# EAGLE board Lora_LR1262_Node_ Board_V1.0 (EAGLE 9.5.1)
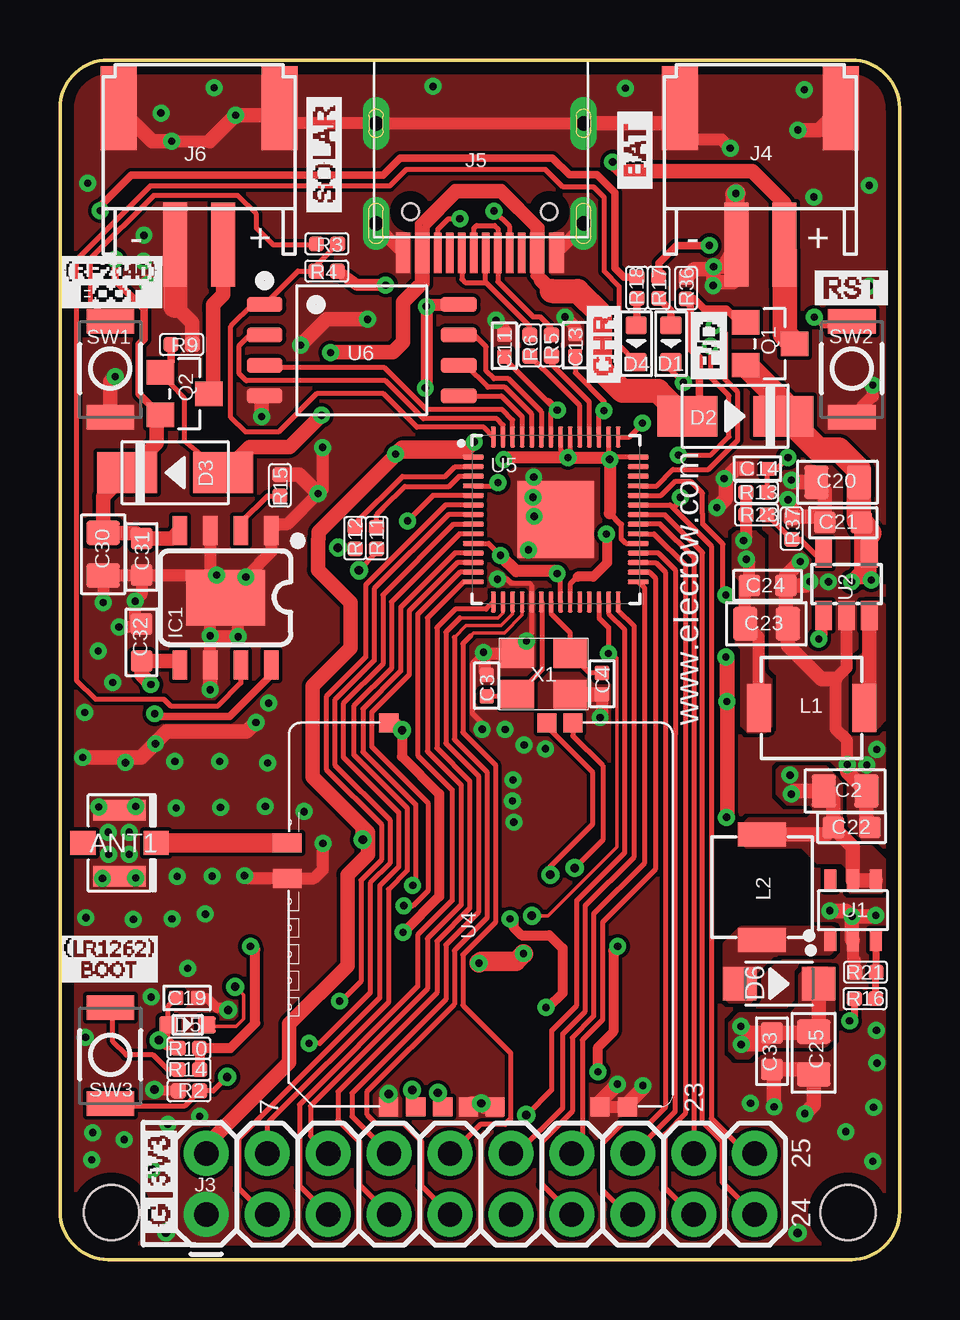
[diagram p0: board, top side]
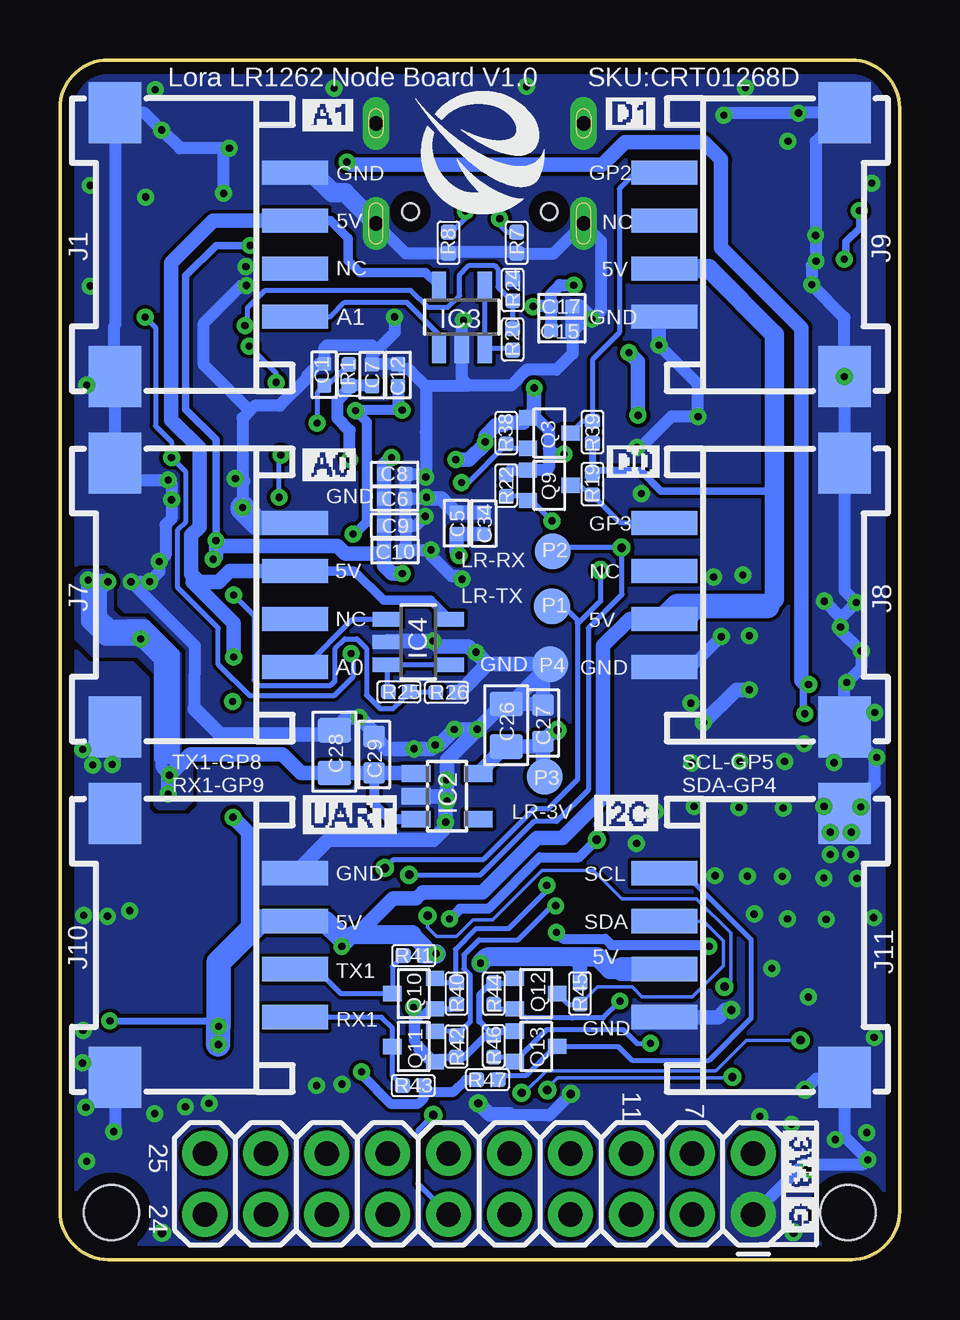
[diagram p1: board, bottom side, seen from below]

Size 35 x 50 mm. Coordinates in mm from the lower left corner, seen from the top.
Outline: 0,2 0,48 arc-90 2,50 33,50 arc-90 35,48 35,2 arc-90 33,0 2,0 arc-90 0,2
Copper layers (1*16): Top 0.035mm / dielectric 1.5mm / Bottom 0.035mm
Design rules "default *": minimum track width 6mil, minimum drill 0.3mm, track to track 6mil, track to pad 6mil, pad to pad 6mil, via to via 6mil, smd to smd 6mil, copper to edge 20mil, drill to drill 6mil, minimum pad ring 10mil, minimum via ring 8mil, stop-mask expansion 4mil, vias tented up to drill 100mil, thermal gap 10mil
Holes 2.3 mm at 2.15,1.95 32.85,1.95
tRestrict: 15 lines

## Footprints (pad centres in the part's own frame; a part is rotated, then mirrored left to right if it is on the bottom)
SPARKFUN2_U.FL = smd 2.2 x 0.85: P$1 0,1.375; P$2 0,-1.375 | smd 1.05 x 1: P$3 1.525,0; P$4 -1.525,0
0402 = smd 0.6 x 0.6: 1 -0.45,0; 2 0.45,0
C0805 = smd 1.016 x 1.397: 1 -0.889,0; 2 0.889,0
C0603 = smd 0.889 x 0.889: 1 -0.762,0; 2 0.762,0
LED0603 = smd 0.762 x 0.889: + -0.762,0; - 0.762,0
SMA = smd 2.5 x 1.7: 1 2,0; 2 -2,0
D_SOD523 = smd 0.762 x 0.7: + -0.8,0; - 0.8,0
D_SOD123FL = smd 1.397 x 1.397: + -1.651,0; - 1.651,0
SOP8-PAD = smd 0.6 x 1.2: 1 -1.905,-2.8; 2 -0.635,-2.8; 3 0.635,-2.8; 4 1.905,-2.8; 5 1.905,2.8; 6 0.635,2.8; 7 -0.635,2.8; 8 -1.905,2.8 | smd 3.3 x 2.311: PAD 0,0
IC_SOT23-5 = smd 0.69 x 1.2: 1 -0.95,-1.3; 2 0,-1.3; 3 0.95,-1.3; 4 0.95,1.3; 5 -0.95,1.3
SOT23-5 = smd 0.6 x 1.2: 1 -0.95,-1.306; 2 0,-1.306; 3 0.95,-1.306; 4 0.95,1.306; 5 -0.95,1.306
CONNECTOR_4P-SMD-2.0-90D = smd 1.01 x 2.74: 1 -3,-0.1; 2 -1,-0.1; 3 1,-0.1; 4 3,-0.1 | smd 2.54 x 2.184: SS1 -5.5,7.4; SS2 5.5,7.4
2X10-DSY-P2.54 = drill 1.016 pad 1.88: 1 0,0; 2 0,2.54; 3 2.54,0; 4 2.54,2.54; 5 5.08,0; 6 5.08,2.54; 7 7.62,0; 8 7.62,2.54; 9 10.16,0; 10 10.16,2.54; 11 12.7,0; 12 12.7,2.54; 13 15.24,0; 14 15.24,2.54; 15 17.78,0; 16 17.78,2.54; 17 20.32,0; 18 20.32,2.54; 19 22.86,0; 20 22.86,2.54
PH2.0WT-2PIN = smd 1 x 3.5: P$1 -1,0; P$2 1,0 | smd 1.5 x 3.5: P$3 -3.35,-5.7; P$4 3.35,-5.7
KEVIN_3.0TYPEC-SMD = smd 0.3 x 1.7: A1 -3.35,0.5; A4 -2.55,0.5; A5 -1.25,0.5; A6 -0.25,0.5; A7 0.25,0.5; A8 1.25,0.5; A9 2.55,0.5; A12 3.35,0.5; B1 3.05,0.5; B4 2.25,0.5; B5 1.75,0.5; B6 0.75,0.5; B7 -0.75,0.5; B8 -1.75,0.5; B9 -2.25,0.5; B12 -3.05,0.5 | drill 0.6 pad 1.016 long: P$1 -4.325,-0.72; P$2 4.325,-0.72; P$3 -4.325,-4.9; P$4 4.325,-4.9 | hole 0.68: -2.89,-1.22; 2.89,-1.22
L0420 = smd 2 x 1: 1 0,2.2; 2 0,-2.2
TEST_PAD-1.5MM = smd 1.5 x 1.5: P$1 0,0
PMOS_SOT23 = smd 1.016 x 1.143: 1 -0.889,-1.016; 2 0.889,-1.016; 3 0,1.016
MOS_SOT323 = smd 0.635 x 0.762: 1 -0.635,-0.889; 2 0.635,-0.889; 3 0,0.889
R0402 = smd 0.635 x 0.635: 1 -0.445,0; 2 0.445,0
MYSMD_157SW = smd 1.016 x 1.981: 1 0,0; 2 4,0
STUDY_SOT23-6L = smd 0.5 x 0.9: 1 -0.961,-1.212; 2 -0.011,-1.212; 3 0.94,-1.212; 4 0.94,1.288; 5 -0.011,1.288; 6 -0.961,1.288
LR1262-MODULE-SMD12 = smd 0.8 x 0.8: 1 0,11.841; 2 0,10.705; 3 0,9.585; 4 0,8.508; 5 0,7.408; 9 0,3.027; 10 0,1.888; 25 16,4.158; 26 16,5.238; 32 16,11.828 | smd 0.8 x 1.2: 33 10.998,16.072; 34 9.518,16.062
RP2040_QFN-56 = smd 0.875 x 0.2: 1 -3.437,2.6; 2 -3.437,2.2; 3 -3.437,1.8; 4 -3.437,1.4; 5 -3.437,1; 6 -3.437,0.6; 7 -3.437,0.2; 8 -3.437,-0.2; 9 -3.437,-0.6; 10 -3.437,-1; 11 -3.437,-1.4; 12 -3.437,-1.8; 13 -3.437,-2.2; 14 -3.437,-2.6; 29 3.437,-2.6; 30 3.437,-2.2; 31 3.437,-1.8; 32 3.437,-1.4; 33 3.437,-1; 34 3.437,-0.6; 35 3.437,-0.2; 36 3.437,0.2; 37 3.437,0.6; 38 3.437,1; 39 3.437,1.4; 40 3.437,1.8; 41 3.437,2.2; 42 3.437,2.6 | smd 0.2 x 0.875: 15 -2.6,-3.437; 16 -2.2,-3.437; 17 -1.8,-3.437; 18 -1.4,-3.437; 19 -1,-3.437; 20 -0.6,-3.437; 21 -0.2,-3.437; 22 0.2,-3.437; 23 0.6,-3.437; 24 1,-3.437; 25 1.4,-3.437; 26 1.8,-3.437; 27 2.2,-3.437; 28 2.6,-3.437; 43 2.6,3.437; 44 2.2,3.437; 45 1.8,3.437; 46 1.4,3.437; 47 1,3.437; 48 0.6,3.437; 49 0.2,3.437; 50 -0.2,3.437; 51 -0.6,3.437; 52 -1,3.437; 53 -1.4,3.437; 54 -1.8,3.437; 55 -2.2,3.437; 56 -2.6,3.437 | smd 3.2 x 3.2: EPAD 0,0
SELF_SOIC-8-208MIL = smd 1.5 x 0.635: 1 -4.05,1.905; 2 -4.05,0.635; 3 -4.05,-0.635; 4 -4.05,-1.905; 5 4.05,-1.905; 6 4.05,-0.635; 7 4.05,0.635; 8 4.05,1.905
SMD3225 = smd 1.4 x 1.2: 1 -1.1,-0.85; 2 1.1,-0.85; 3 1.1,0.85; 4 -1.1,0.85

## Placement (x,y rotation side)
ANT1  SPARKFUN2_U.FL  [SPARKFUN2_U.FL]  2.48,17.36 0 top
C1  2.2UF  [0402]  23.98,36.88 270 bottom
C2  10UF  [C0805]  32.73,19.53 180 top
C3  15PF  [0402]  17.79,23.92 270 top
C4  15PF  [0402]  22.6,24 90 top
C5  100NF  [0402]  18.47,30.69 270 bottom
C6  100NF  [0402]  21.05,31.72 180 bottom
C7  100NF  [0402]  21.99,36.86 270 bottom
C8  100NF  [0402]  21.05,32.74 180 bottom
C9  100NF  [0402]  21.05,30.59 180 bottom
C10  2.2UF  [0402]  21.04,29.53 180 bottom
C11  2.2UF  [0402]  18.53,38.09 270 top
C12  100NF  [0402]  20.9,36.87 270 bottom
C13  100NF  [0402]  21.48,38.11 270 top
C14  100NF  [0402]  29.08,32.96 0 top
C15  100NF  [0402]  14.08,38.73 180 bottom
C17  2.2UF  [0402]  14.08,39.73 180 bottom
C19  100NF  [0402]  5.3,10.9 180 top
C20  10UF  [C0805]  32.42,32.4 0 top
C21  1UF  [C0603]  32.65,30.71 0 top
C22  1UF  [C0603]  33,18.01 180 top
C23  22UF  [C0805]  29.45,26.5 180 top
C24  1UF  [C0603]  29.5,28.1 180 top
C25  22UF  [C0805]  31.42,8.61 90 top
C26  22UF  [C0805]  16.39,22.27 270 bottom
C27  1UF  [C0603]  14.86,22.36 270 bottom
C28  10UF  [C0805]  23.56,21.17 270 bottom
C29  1UF  [C0603]  21.9,21.05 270 bottom
C30  22UF  [C0805]  1.8,29.4 90 top
C31  1UF  [C0603]  3.4,29.29 90 top
C32  100nF  [C0603]  3.4,25.72 270 top
C33  1UF  [C0603]  29.68,8.68 90 top
C34  100NF  [0402]  17.33,30.68 270 bottom
D1  BLUE  [LED0603]  25.47,38.17 270 top
D2  SS24  [SMA]  28.15,35.15 0 top
D3  SS24  [SMA]  4.8,32.8 180 top
D4  RED  [LED0603]  24.02,38.17 270 top
D5  LBAT54XV2T1G  [D_SOD523]  5.32,9.78 0 top
D6  DSK24  [D_SOD123FL]  29.98,11.5 0 top
IC1  CN3163-SOP8-PAD  [SOP8-PAD]  6.9,27.58 180 top
IC2  ME6217C33M5G-SOT23-5  [IC_SOT23-5]  18.86,19.31 270 bottom
IC3  SGM321YN5  [SOT23-5]  18.25,39.28 0 bottom
IC4  SGM321YN5  [SOT23-5]  20.06,25.74 270 bottom
J1  [CONNECTOR_4P-SMD-2.0-90D]  25.3,42.3 90 bottom
J3  [2X10-DSY-P2.54]  6.1,1.88 0 top
J4  PH2.0WT-2PIN  [PH2.0WT-2PIN]  29.2,42.3 180 top
J5  TYPEC-3.0-16P-SMD  [KEVIN_3.0TYPEC-SMD]  17.5,42.46 180 top
J6  PH2.0WT-2PIN  [PH2.0WT-2PIN]  5.8,42.3 180 top
J7  [CONNECTOR_4P-SMD-2.0-90D]  25.3,27.7 90 bottom
J8  [CONNECTOR_4P-SMD-2.0-90D]  9.7,27.7 270 bottom
J9  [CONNECTOR_4P-SMD-2.0-90D]  9.7,42.3 270 bottom
J10  [CONNECTOR_4P-SMD-2.0-90D]  25.3,13.1 90 bottom
J11  [CONNECTOR_4P-SMD-2.0-90D]  9.7,13.1 270 bottom
L1  2.2UH  [L0420]  31.33,22.99 270 top
L2  3.3UH  [L0420]  29.27,15.52 0 top
P1  TEST_PADPAD-1.5MM  [TEST_PAD-1.5MM]  14.49,27.22 0 bottom
P2  TEST_PADPAD-1.5MM  [TEST_PAD-1.5MM]  14.45,29.52 0 bottom
P3  TEST_PADPAD-1.5MM  [TEST_PAD-1.5MM]  14.8,20.13 0 bottom
P4  TEST_PADPAD-1.5MM  [TEST_PAD-1.5MM]  14.56,24.82 0 bottom
Q1  AO3401  [PMOS_SOT23]  29.6,38.17 270 top
Q2  AO3401  [PMOS_SOT23]  5.2,36.09 270 top
Q3  [MOS_SOT323]  14.6,34.45 270 bottom
Q9  [MOS_SOT323]  14.6,32.27 270 bottom
Q10  [MOS_SOT323]  20.25,11.09 90 bottom
Q11  [MOS_SOT323]  20.25,8.88 90 bottom
Q12  [MOS_SOT323]  15.15,11.09 270 bottom
Q13  [MOS_SOT323]  15.15,8.88 270 bottom
R1  10R  [R0402]  22.96,36.87 90 bottom
R2  10K  [R0402]  5.38,7.03 180 top
R3  1K  [R0402]  11.13,42.34 0 top
R4  10K  [R0402]  11.12,41.2 180 top
R5  22R  [R0402]  20.49,38.1 270 top
R6  22R  [R0402]  19.59,38.1 270 top
R7  5.1K  [R0402]  15.96,42.38 270 bottom
R8  5.1K  [R0402]  18.8,42.38 90 bottom
R9  100K  [R0402]  5.07,38.14 0 top
R10  10K  [R0402]  5.37,8.81 180 top
R11  470R  [R0402]  13.2,30.07 270 top
R12  470R  [R0402]  12.3,30.07 270 top
R13  10K  [R0402]  29.04,31.98 0 top
R14  1K  [R0402]  5.38,7.92 180 top
R15  1.2K 1%  [R0402]  9.17,32.27 270 top
R16  75K 1%  [R0402]  33.56,10.87 0 top
R17  3.3K  [R0402]  24.96,40.5 90 top
R18  5.62K  [R0402]  24.05,40.5 90 top
R19  4.7K  [R0402]  12.8,32.32 90 bottom
R20  240R 1%  [R0402]  16.13,38.35 90 bottom
R21  10K 1%  [R0402]  33.58,11.98 180 top
R22  4.7K  [R0402]  16.4,32.26 90 bottom
R23  45.3K 1%  [R0402]  29.04,31.04 180 top
R24  470R 1%  [R0402]  16.13,40.41 90 bottom
R25  240R 1%  [R0402]  20.87,23.66 0 bottom
R26  470R 1%  [R0402]  18.89,23.64 0 bottom
R36  100K  [R0402]  26.1,40.49 90 top
R37  10K 1%  [R0402]  30.5,30.47 270 top
R38  4.7K  [R0402]  16.4,34.45 90 bottom
R39  4.7K  [R0402]  12.8,34.49 270 bottom
R40  4.7K  [R0402]  18.47,11.09 270 bottom
R41  4.7K  [R0402]  20.25,12.67 0 bottom
R42  4.7K  [R0402]  18.48,8.88 270 bottom
R43  4.7K  [R0402]  20.28,7.25 0 bottom
R44  4.7K  [R0402]  16.92,11.09 90 bottom
R45  4.7K  [R0402]  13.32,11.09 90 bottom
R46  4.7K  [R0402]  16.92,8.88 90 bottom
R47  4.7K  [R0402]  17.18,7.5 180 bottom
SW1  [MYSMD_157SW]  2.1,35.1 90 top
SW2  [MYSMD_157SW]  33.01,35.1 90 top
SW3  [MYSMD_157SW]  2.1,6.5 90 top
U1  SX1308-SOT23  [STUDY_SOT23-6L]  33.07,14.52 0 top
U2  RY3420  [IC_SOT23-5]  32.79,28.15 0 top
U4  LR1262-MODULE-SMD12  [LR1262-MODULE-SMD12]  25.54,6.37 90 top
U5  RP2040_RP2040  [RP2040_QFN-56]  20.67,30.85 0 top
U6  W25Q32JV  [SELF_SOIC-8-208MIL]  12.58,37.9 0 top
U$55  [ELECROW-NEW]  20.23,43.56 0 bottom
X1  12MHZ  [SMD3225]  20.17,24.41 0 top

## Library data of the parts
ANT1 C1-C15 C17 C19-C34 D1-D6 IC1 IC2 J1 J3-J11 L1 L2 P1-P4 Q1-Q3 Q9-Q13 R1-R26 R36-R47 SW1-SW3 U2 U4 U6 X1 = Lora_RA-08H_Node_ Board
IC3 IC4 = linear
U1 = Crowtail- Air Quality Sensor  v1.0
U5 = Lora_RA-08H_Node_ Board; PROD_ID: IC-15502
U$55 = logo

## Nets
+1V1: C11.2 C12.2 C13.2 U5.23 U5.45 U5.50
+3V3: C5.2 C6.2 C7.2 C8.2 C9.2 C10.2 C15.2 C17.2 C23.2 C24.2 C34.2 J3.2 L1.2 Q3.1 Q9.1 Q10.1 Q11.1 Q12.1 Q13.1 R1.1 R4.1 R13.1 R17.2 R22.2 R23.2 R38.2 R40.2 R42.2 R44.2 R46.2 U5.1 U5.10 U5.22 U5.33 U5.42 U5.44 U5.48 U5.49 U6.8
+5V: C25.2 C33.2 D6.- IC3.5 IC4.5 J1.3 J7.3 J8.3 J9.3 J10.3 J11.3 R16.1 R19.2 R39.2 R41.2 R43.2 R45.2 R47.2
+SOLAR: J6.P$1 Q2.3
+VBAT: C32.2 IC1.5 IC1.8 J4.P$1 Q1.3
+VBUS: D2.2 D3.2 J5.A4 J5.A9 J5.B4 J5.B9 Q1.1 Q2.1 R9.1 R36.1
+VIN: C30.2 C31.2 D3.1 IC1.4 Q2.2 R18.2
+VSYS: C2.2 C20.2 C21.2 C22.2 C28.2 C29.2 D2.1 IC2.1 IC2.3 L2.1 Q1.2 U1.4 U1.5 U2.1 U2.4
A0: R25.2 R26.1 U5.38
A0_IN: IC4.1 J7.1
A0_OUT: IC4.3 IC4.4 R25.1
A1: R20.2 R24.1 U5.39
A1_IN: IC3.1 J1.1
A1_OUT: IC3.3 IC3.4 R20.1
A2: U5.40
A3: U5.41
BOOT: R3.1 SW1.2
CHRG: D4.- IC1.7
D0/TX0: R12.1 U5.2
D1/RX0: R11.1 U5.3
D2: Q3.2 R38.1 U5.4
D2_H: J9.1 Q3.3 R39.1
D3: Q9.2 R22.1 U5.5
D3_H: J8.1 Q9.3 R19.1
D4/SDA0: Q12.2 R44.1 U5.6
D4/SDA0_H: J11.2 Q12.3 R45.1
D5/SCL0: Q13.2 R46.1 U5.7
D5/SCL0_H: J11.1 Q13.3 R47.1
D6: J3.3 U5.8
D7: J3.4 U5.9
D8/TX1: Q10.2 R40.1 U5.11
D8/TX1_H: J10.2 Q10.3 R41.1
D9/RX1: Q11.2 R42.1 U5.12
D9/RX1_H: J10.1 Q11.3 R43.1
D10: J3.5 U5.13
D11: J3.6 U5.14
D12: J3.7 U5.15
D13: J3.8 U5.16
D14: J3.9 U5.17
D15: J3.10 U5.18
D16: J3.11 U5.27
D17: J3.12 U5.28
D18: J3.13 U5.29
D19: J3.14 U5.30
D20: J3.15 U5.31
D21: J3.16 U5.32
D22: J3.17 U5.34
D23: J3.18 U5.35
D24: J3.19 U5.36
D25: D1.- J3.20 U5.37
DN: J5.A7 J5.B7 R5.1
DP: J5.A6 J5.B6 R6.1
GND: ANT1.P$1 ANT1.P$2 C1.1 C2.1 C3.1 C4.1 C5.1 C6.1 C7.1 C8.1 C9.1 C10.1 C11.1 C12.1 C13.1 C14.1 C15.1 C17.1 C19.1 C20.1 C21.1 C22.1 C23.1 C24.1 C25.1 C26.1 C27.1 C28.1 C29.1 C30.1 C31.1 C32.1 C33.1 C34.1 IC1.1 IC1.3 IC1.6 IC1.PAD IC2.2 IC3.2 IC4.2 J1.4 J1.SS1 J1.SS2 J3.1 J4.P$2 J4.P$3 J4.P$4 J5.A1 J5.A12 J5.B1 J5.B12 J5.P$1 J5.P$2 J5.P$3 J5.P$4 J6.P$2 J6.P$3 J6.P$4 J7.4 J7.SS1 J7.SS2 J8.4 J8.SS1 J8.SS2 J9.4 J9.SS1 J9.SS2 J10.4 J10.SS1 J10.SS2 J11.4 J11.SS1 J11.SS2 P4.P$1 R2.2 R7.2 R8.1 R9.2 R15.1 R21.2 R24.2 R26.2 R36.2 R37.1 SW1.1 SW2.1 U1.2 U2.2 U4.1 U4.4 U4.5 U4.9 U4.10 U4.34 U5.19 U5.EPAD U6.4 X1.2 X1.4
LR_BOOT: R2.1 SW3.1 U4.2
N$1: C1.2 R1.2 U5.43
N$2: J5.B5 R7.1
N$3: L1.1 U2.3
N$4: D6.+ L2.2 U1.1
N$6: J5.A5 R8.2
N$7: R14.2 SW3.2
N$8: ANT1.P$3 U4.33
N$9: R23.1 R37.2 U2.5
N$10: IC1.2 R15.2
N$11: D4.+ R18.1
N$13: R16.2 R21.1 U1.3
N$14: D1.+ R17.1
NRST: C19.2 D5.+ R10.2 U4.3
QSPI_CS: R3.2 R4.2 U5.56 U6.1
QSPI_D0: U5.53 U6.5
QSPI_D1: U5.55 U6.2
QSPI_D2: U5.54 U6.3
QSPI_D3: U5.51 U6.7
QSPI_SCK: U5.52 U6.6
RESET: C14.2 D5.- R13.2 SW2.2 U5.26
RF_3V3: C26.2 C27.2 IC2.5 P3.P$1 R10.1 R14.1 U4.32
RF_RX: P2.P$1 R12.2 U4.26
RF_TX: P1.P$1 R11.2 U4.25
SWCLK: U5.24
SWDIO: U5.25
USB_D+: R6.2 U5.47
USB_D-: R5.2 U5.46
XIN: C3.2 U5.20 X1.1
XOUT: C4.2 U5.21 X1.3

## Tracks (layer width: path | path; a pad name or v marks a point on that pad's centre or on a via)
+1V1  (via drill 0.3 pad 0.6)
  Top 0.203: 20.27,35.82 20.62,35.47 20.47,35.31 20.47,35.19 | 20.27,35.82 18.53,37.56 C11.2 | C13.2 21.48,36.97 22.68,35.77 v22.68,35.39 22.47,35.18 U5.45 | 20.73,35.45 v20.73,35.41 | U5.50 20.47,35.19 | 21.58,28.46 21.27,28.15 U5.23 | 20.47,35.19 20.73,35.45 | 20.27,35.82 20.36,35.82 20.73,35.45
  Top 0.406: v22.78,30.24 22.81,30.21 22.81,29.04 22.23,28.46 21.58,28.46
  Bottom 0.406: v20.73,35.41 20.75,35.43 22.64,35.43 v22.68,35.39 22.21,34.92 22.21,30.73 22.71,30.24 v22.78,30.24
  Bottom 0.508: C12.2 20.9,35.58 v20.73,35.41
+3V3  (via drill 0.3, 0.3 pad 0.6, 0.35)
  Top 0.203: U5.49 20.87,33.74 v21.18,33.43 21.27,33.52 U5.48 | U5.44 22.87,33.4 v22.92,33.35 23.01,33.44 U5.42 | 23.39,30.64 23.39,30.06 23.6,29.85 U5.33 | U5.10 17.87,29.85 v18.37,29.35 | U5.1 14.1,33.46 v13.99,33.57 | U5.22 20.87,28.45 v20.73,28.59
  Top 0.25: 22.92,31.11 23.39,30.64
  Top 0.305: R17.2 24.96,41.54 25.69,42.27 v27.07,42.27
  Top 0.406: v18.76,14.2 18.91,14.05 18.91,13.85 19.24,13.52 20.4,13.52 20.95,12.97 20.95,11.1 20.35,10.5 v20.26,10.5
  Top 0.508: 22.87,33.4 22.84,33.43 v21.18,33.43 18.59,33.43 v18.5,33.34 | v22.92,33.35 22.92,31.11 | U6.8 15.35,39.8 v15.27,39.73 15.27,36.37 v15.23,36.33 | v13.58,40.62 12.39,40.62 R4.1 | L1.2 29.13,25.93 C23.2 28.56,27.92 C24.2 28.74,29.07 v28.62,29.19 | v28.5,29.97 28.6,30.07 R23.2 R13.1 | v20.73,28.59 20.63,28.69 19.03,28.69 v18.37,29.35
  Top 0.6: v13.99,33.57 13.99,33.53 10.79,30.32 | J3.2 6.1,4.76 6.39,5.05 9.56,8.22 9.56,9.82 11.99,12.25 | 10.99,19.66 11.81,18.84
  Top 0.61: v17.27,34.08 17.03,33.84 14.26,33.84 v13.99,33.57 | 10.79,30.32 10.79,30.05 10.76,30.02 10.76,28.75 12.11,27.39 12.11,25.48 10.54,23.91 10.54,20.11 10.99,19.66 | 11.81,18.84 12.62,18.03 | 12.62,18.03 12.85,17.8 | 11.99,12.25 11.99,16.03 12.85,16.89 12.85,17.73 v12.62,17.5 12.62,18.03
  Bottom 0.254: R46.2 17.52,9.93 17.52,11.04 17.05,11.51 | R44.2 16.23,11.51 Q12.1
  Bottom 0.26: 17.04,11.51 R44.2 | Q10.1 18.66,10.45 R40.2
  Bottom 0.3: Q11.1 19.64,8.24 20.12,8.73 20.12,9.96 19.63,10.45 Q10.1
  Bottom 0.305: v28.5,29.97 28.5,34.18 29.75,35.43 29.75,41.01 28.49,42.27 v27.07,42.27 | Q11.1 19.18,8.44 R42.2 18.15,8.44 17.27,9.32 R46.2 16.73,9.52 Q13.1 | 17.05,11.51 R44.2
  Bottom 0.406: Q11.1 20.26,9.14 v20.26,10.5 | v12.62,17.5 13.36,16.76 15,16.76 17.14,14.62 18.33,14.62 v18.76,14.2
  Bottom 0.508: C7.2 22.01,36.42 R1.1 22.96,36.28 23.44,35.8 23.44,35.08 22.92,34.56 v22.92,33.35 | C17.2 C15.2 | C17.2 15.06,39.73 v15.27,39.73 | C17.2 14.53,40.25 14.16,40.62 v13.58,40.62 | Q3.1 15.15,35.09 14.62,34.55 14.62,33.81 | 14.62,33.81 14.38,33.57 v13.99,33.57 | 14.62,33.81 14.62,32.99 14.71,32.91 Q9.1 16.2,32.91 R22.2
  Bottom 0.61: v21.18,33.43 21.5,33.11 C8.2 C6.2 C9.2 C10.2 | v18.5,33.34 17.95,33.34 17.27,34.02 v17.27,34.08 17.27,34.32 16.81,34.78 16.51,34.78 R38.2 15.68,34.9 Q3.1 15.23,35.34 v15.23,36.33 | v28.62,29.19 28.5,29.31 v28.5,29.97 28.27,29.73 23.42,29.73 23.12,29.43 21.59,29.43 C10.2 | C34.2 C5.2 18.47,29.53 18.42,29.47 18.42,29.4 v18.37,29.35 | C10.2 21.49,28.93 21.15,28.59 v20.73,28.59
  pour Bottom (no thermals): 23.93,28.55 23.93,28.95 23.93,29.03
  pour Top (no thermals): 28.65,21.99 28.4,22.24 28.4,24.14 28.4,25.43 28.18,25.65 28.18,27.08 28.33,27.23 28.36,27.26 28.36,28.27 28.06,28.57 28.06,30.2 28.21,30.35 29.02,30.35 29.34,30.03 29.34,29.82 29.34,24.55 29.37,24.52 29.37,24.46 29.65,24.18 29.65,22.22 29.43,22 29.39,21.96 28.8,21.96 28.68,21.96
+5V  (via drill 0.3 pad 0.6)
  Top 0.3: R16.1 33.12,10.15 v32.92,9.95
  Top 0.406: v22.43,7.82 22.43,8.85 23.07,9.49 23.07,12.87 v23.25,13.05
  Top 0.6: D6.- 31.63,9.71 C25.2 31.36,9.44 C33.2 | C33.2 28.67,9.44 v28.39,9.72 | v27.76,25.11 27.82,25.05 27.82,18.46 v27.79,18.43 | C33.2 29.2,8.96 v28.4,8.96
  Top 0.61: v27.81,23.26 27.81,25.06 v27.76,25.11
  Top 0.813: v19.33,12.75 19.01,12.43 17.54,12.43 v17.46,12.35
  Bottom 0.3: 10.79,32.88 12.68,32.88 R19.2 R39.2 | v32.92,9.95 28.62,9.95 v28.39,9.72
  Bottom 0.305: 5.21,32.04 9.95,32.04 10.79,32.88
  Bottom 0.4: J1.3 23.71,43.3 22.99,42.58 22.99,41.64 22.49,41.14 19.75,41.14 IC3.5 | J7.3 22.73,28.7 21.52,27.49 19.55,27.49 IC4.5
  Bottom 0.406: v22.43,7.82 22.43,7.71 21.22,6.5 20.06,6.5 19.83,6.73 R43.2 19.57,6.99 18.59,6.99 18.08,7.5 R47.2
  Bottom 0.6: v23.25,13.05 22.75,13.55 22.66,13.64 | 19.81,13.04 19.81,12.75 R41.2 | 29.46,28.24 27.76,26.54 v27.76,25.11 | v27.79,18.43 27.16,17.8 27.16,13.62
  Bottom 0.61: v23.25,13.05 23.25,13.41 | J7.3 27.92,28.7 28.38,28.24 29.19,28.24 | 29.19,28.24 29.46,28.24 | 29.19,28.24 29.53,28.58 29.53,30.19 29.18,30.54 29.18,33.82 30.36,35 30.36,41.55 28.61,43.3 J1.3 | J8.3 11.24,26.7 12.36,25.58 12.36,19.26 14.04,17.58 15.12,17.58 17.39,15.31 19.89,15.31 20.15,15.05 21.12,15.05 22.53,13.64 22.66,13.64 | R45.2 13.32,12.35 13.57,12.6
  Bottom 0.7: 19.81,13.04 20.32,13.55
  Bottom 0.8: v17.46,12.35 17.21,12.6 13.57,12.6 | 22.75,13.55 20.32,13.55
  Bottom 0.813: J9.3 7.95,41.3 5.21,38.56 5.21,32.04 5.21,27.53 5.51,27.23 | 19.81,12.75 v19.33,12.75 | 26.68,14.1 27.66,13.12 | 11.56,12.1 12.08,12.1 12.58,12.6 13.57,12.6
  Bottom 0.9: 23.25,13.41 23.94,14.1 J10.3
  Bottom 1: J8.3 9.03,26.7 8.49,27.24 | J11.3 11.56,12.1
  Bottom 1.016: J8.3 9.27,27.23 5.51,27.23 | J10.3 26.68,14.1 27.16,13.62 | 27.22,13.56 27.66,13.12 28.39,12.39 v28.39,9.72 v28.4,9.71 v28.4,8.96
  pour Top (no thermals): 30.91,11.63 30.91,10.59 30.48,10.16 28.33,10.16 27.98,9.81 27.98,8.76 28.26,8.48 28.69,8.48 29.18,8.97 30.39,8.97 31.88,8.97 32.1,9.19 32.19,9.28 32.19,11.34 32.19,11.87 31.98,12.08 31.16,12.08 30.91,11.83 30.91,11.68
+SOLAR
  Top 0.6: J6.P$1 6.92,41.78 | 6.39,39.52 6.39,36.26 Q2.3
  Top 0.61: 6.39,39.52 6.39,39.81 6.8,40.22 J6.P$1
+VBAT  (via drill 0.3 pad 0.6)
  Top 0.305: IC1.8 8.8,24.36 7.08,22.63 4.07,22.63 v3.95,22.75
  Top 0.6: v3.79,23.97 3.4,24.36 C32.2 4.82,24.96 IC1.5
  Top 0.61: J4.P$1 30.2,44.03 28.86,45.37 23.42,45.37 v23.04,45.75
  Top 1.016: J4.P$1 30.21,41.89 30.21,38.58 Q1.3
  Bottom 0.305: v3.95,22.75 4.02,22.82 4.02,23.74 v3.79,23.97
  Bottom 0.61: v23.04,45.75 23,45.75 22.89,45.64 12.39,45.64 11.45,46.58 8.16,46.58 7.44,45.86 7.44,42.18 4.09,38.83 4.09,24.14 3.92,23.97 v3.79,23.97
+VBUS  (via drill 0.3 pad 0.6)
  Top 0.203: Q2.1 5.17,35.92 5.17,34.13 D3.2 | 28.55,39.06 Q1.1
  Top 0.3: J5.A4 20.05,40.82 20.05,40.7 19.75,41 J5.B9
  Top 0.305: 14.95,40.55 J5.A9 14.95,43.17 16.45,44.67 18.42,44.67 20.05,43.04 J5.A4 | 15.25,40.66 J5.B4 15.25,43.06 16.57,44.38 18.35,44.38 19.75,42.98 J5.B9 | R9.1 4.62,37.42 Q2.1 | D2.2 26.65,35.65 26.65,37.6 26.28,37.97 26.28,39.87 R36.1 26.43,40.05 26.86,39.62 27.79,39.62 28.34,39.06 28.55,39.06
  Top 0.6: 20.05,40.82 20.5,40.37
  Top 0.61: D3.2 6.83,32.8 7.9,33.87 9.58,33.87 v10.9,35.19 | v11.28,37.8 11.28,37.83 13.88,37.83 14.3,38.25 14.3,39.9 14.95,40.55
  Top 0.8: 25.98,35.15 D2.2
  Top 1: 25.98,35.15 24.93,36.2 23.45,36.2 22.51,37.14 22.51,39.44 21.58,40.37 20.5,40.37
  Bottom 0.61: v11.28,37.8 10.9,37.42 v10.9,35.19
+VIN  (via drill 0.3 pad 0.6)
  Top 0.305: v1.68,43.72 1.68,43.9 2.98,45.2 13.46,45.2 14.18,45.92 20.54,45.92 21.25,45.21 22.39,45.21 23.12,44.48 23.12,41.33 23.51,40.94 R18.2 | v2.3,41.7 v2.31,41.69 2.31,40.82 3.52,39.62 3.52,38.37 3.31,38.16 3.31,36.08 Q2.2
  Top 0.61: Q2.2 4.04,35.06 4.04,34.04 D3.1 1.8,31.8 C30.2 3.16,30.29 C31.2 4.67,30.05 IC1.4
  Bottom 0.305: v2.3,41.7 2.23,41.77 2.23,42.42 1.65,43 1.65,43.69 v1.68,43.72
+VSYS  (via drill 0.3 pad 0.6)
  Top 0.305: v31.63,25.86 31.84,26.07 U2.1
  Top 0.508: v33,28.25 33.15,28.4 33.74,28.4
  Top 0.6: v30.48,19.4 30.61,19.53 C2.2 32.24,19.13 C22.2 | C22.2 31.95,17.72 L2.1 | C22.2 33.06,17.19 U1.5 U1.4
  Top 0.61: 33.74,30.28 U2.4 33.74,28.4 v33.82,28.32 | C21.2 33.41,28.66 v33,28.25
  Top 1.016: 33.74,30.28 C21.2 33.31,30.81 C20.2 33.31,32.92 32.47,33.76 31.61,33.76 30.22,35.15 D2.1 30.15,35.72 Q1.2
  Bottom 0.305: v31.63,25.86 31.66,25.89 31.75,25.98
  Bottom 0.406: C29.2 21.9,18.98 21.28,18.36 IC2.3
  Bottom 0.508: v30.43,20.19 30.78,20.54 30.78,20.91 30.29,20.91 30.26,20.94 | 33.82,27.78 33.47,27.78 v33,28.25 | v33,28.25 33.07,28.32 v33.82,28.32 | v33,28.25 33.3,27.95 33.3,26.85 32.87,26.42 32.19,26.42 | 31.75,25.98 32.19,26.42 | 30.78,25.03 30.78,25.78 | 32.19,26.42 31.42,26.42 30.78,25.78 | 30.78,25.78 30.26,25.26 30.26,21.2 | 30.26,21.2 30.26,21.09 | 30.78,21.54 30.44,21.2 30.26,21.2
  Bottom 0.6: 29.57,21.06 v30.43,20.19 30.48,20.14 v30.48,19.4
  Bottom 0.61: 30.78,20.91 30.78,21.54 30.78,25.03 30.8,25.03 v31.63,25.86 | v33.82,28.32 33.82,27.78 33.82,26.59 33.12,25.89 31.66,25.89 | 29.57,21.06 25.72,21.06 24.94,20.28 C28.2 C29.2 20.19,20.29 IC2.1
  pour Bottom (no thermals): 30,21.06 29.52,20.58 29.52,19.09 29.81,18.8 30.89,18.8 31.03,18.94 31.03,24.42 31.76,25.15 33.61,25.15 34.43,25.97 34.43,28.32 34.04,28.71 33.22,28.71 32.82,28.31 32.82,27.07 32.83,27.06 32.49,26.72 31.47,26.72 30,25.25 30,21.07 29.99,21.06
  pour Top (no thermals): 30.27,20.53 31.93,20.53 32.27,20.19 32.58,19.88 32.58,18.62 32.58,17.64 33.03,17.19 33.85,17.19 34.45,16.59 34.45,15.52 34.24,15.31 34.23,15.3 32.95,15.3 32.86,15.39 32.86,16.11 32.86,16.29 32.66,16.49 32.59,16.56 31.57,16.56 30.93,17.2 28.68,17.2 28.61,17.2 28.34,17.47 28.34,18 28.48,18.14 28.71,18.37 30.35,18.37 31.16,18.37 31.42,18.63 31.42,18.83 31.32,18.93 31.26,18.99 30.32,18.99 29.91,19.4 29.91,19.62 29.91,20.4 30.04,20.53 30.26,20.53
A0  (via drill 0.3 pad 0.6)
  Top 0.203: U5.38 25.06,31.85 25.63,32.42 26.31,32.42 26.78,31.95 26.78,31.09 26.79,31.08 26.79,30.67 27.65,29.81 27.65,27.89 27.76,27.78 v27.76,27.7
  Bottom 0.203: v27.76,27.7 26.91,26.85 26.91,24.15 26.69,23.93 23.71,23.93 23.55,24.09 23.55,25.44 23.12,25.87 22.62,25.87 22.22,25.47 22.22,23.53 21.65,22.96 21.11,22.96 20.74,23.33 20.74,23.34 20.45,23.64 | 20.45,23.64 R25.2 | R26.1 20.45,23.64
A0_IN
  Bottom 0.203: 25.18,24.72 J7.1 24.79,24.7 22.8,26.69 IC4.1
A0_OUT
  Bottom 0.203: IC4.4 IC4.3 21.37,23.71 R25.1
A1  (via drill 0.3)
  Top 0.203: U5.39 24.88,32.25 25.56,32.93 27.03,32.93 28.25,34.15 28.25,36.15 27.73,36.67 27.73,38.64 27.58,38.79 27.43,38.79 v27.29,38.93
  Bottom 0.203: v27.29,38.93 27.18,39.04 27.18,39.67 26.44,40.41 20.38,40.41 19.66,39.69 18.84,39.69 18.34,40.19 18.34,41.04 17.94,41.44 16.89,41.44 16.75,41.29 16.75,40.54 16.17,39.97 R24.1 R20.2
A1_IN
  Bottom 0.203: IC3.1 19.2,38.55 20.55,39.9 23.13,39.9 23.73,39.3 J1.1
A1_OUT
  Bottom 0.203: IC3.4 IC3.3 16.2,37.97 R20.1
BOOT
  Top 0.203: R3.1 10.64,42.29 8.9,42.29 8.19,43 8.19,43.57 7.41,44.35 3.9,44.35 1.27,41.72 1.27,39.93 SW1.2
CHRG
  Top 0.203: D4.- 23.32,38.11 23.32,40.56 22.69,41.19 22.69,44.27 22.26,44.7 20.97,44.7 20.24,45.43 14.43,45.43 13.74,44.74 3.76,44.74 0.69,41.66 0.69,24.16 1.48,23.36 4.33,23.36 4.61,23.08 6.59,23.08 7.54,24.02 IC1.7
D0/TX0
  Top 0.2: 14.27,32.64 12.3,30.67 R12.1
  Top 0.203: U5.2 16.47,33.05 16.06,32.64 14.27,32.64
D1/RX0
  Top 0.2: 13.47,31.32 13.2,31.05 R11.1
  Top 0.203: 13.47,31.32 14.38,32.23 16.23,32.23 16.65,32.65 U5.3
D2  (via drill 0.3 pad 0.6)
  Top 0.203: v18.27,32.39 18.13,32.25 U5.4
  Bottom 0.203: 17.98,32.39 v18.27,32.39 17.97,32.39 16.4,33.96 R38.1 16.21,33.81 Q3.2
D2_H
  Bottom 0.203: J9.1 11.01,45.3 11.68,44.63 11.68,38.63 12.8,37.51 R39.1 13.23,34.93 Q3.3
D3  (via drill 0.3 pad 0.6)
  Top 0.203: v14.49,30.79 15.55,31.85 U5.5
  Bottom 0.203: v14.49,30.79 15.34,31.64 Q9.2 15.67,31.82 R22.1
D3_H
  Bottom 0.203: J8.1 11.63,30.7 12.8,31.87 R19.1 12.92,31.88 13.31,32.27 Q9.3
D4/SDA0  (via drill 0.3 pad 0.6)
  Top 0.203: U5.6 16.08,31.45 12.75,28.12 12.75,25.11 11.1,23.46 11.1,20.43 13.4,18.13 13.4,16.66 12.55,15.81 12.55,11.6 11.73,10.77 v11.66,10.77
  Bottom 0.203: R44.1 16.73,10.45 Q12.2 15.68,10.09 15.56,10.09 15.54,10.07 13.65,10.07 12.36,10.07 v11.66,10.77
D4/SDA0_H
  Bottom 0.152: R45.1 12.6,11.36 11.14,11.36 10.73,10.95 8.63,10.95 7.34,12.24 7.34,13.29 8.15,14.1 J11.2
  Bottom 0.203: Q12.3 13.82,10.64 R45.1
D5/SCL0  (via drill 0.3 pad 0.6)
  Top 0.203: U5.7 16.19,31.05 13.1,27.96 13.1,24.97 11.45,23.32 11.45,20.62 13.76,18.31 13.76,16.51 12.94,15.69 12.94,11.12 10.82,9.01 v10.38,9.01
  Bottom 0.203: R46.1 16.23,8.44 Q13.2 14.7,9.59 11.52,9.59 10.94,9.01 v10.38,9.01
D5/SCL0_H
  Bottom 0.203: R47.1 16.55,7.68 15.56,7.68 14.35,8.88 Q13.3 11.73,8.88 11.16,8.31 7.93,8.31 6.19,10.05 6.19,13.35 8.94,16.1 J11.1
D6
  Top 0.203: U5.8 16.41,30.65 13.46,27.7 13.46,24.82 11.81,23.17 11.81,20.95 14.12,18.64 14.12,16.36 13.33,15.58 13.33,10.91 7.45,5.03 7.45,2.97 8.53,1.88 J3.3
D7
  Top 0.203: U5.9 16.65,30.25 13.81,27.41 13.81,24.64 12.24,23.06 12.24,21.05 14.47,18.82 14.47,16.22 13.69,15.44 13.69,10.72 8.64,5.67 J3.4
D8/TX1  (via drill 0.3 pad 0.6)
  Top 0.203: U5.11 16.47,29.45 14.2,27.18 14.2,24.52 12.63,22.95 12.63,21.16 14.83,18.97 14.83,15.71 v14.71,15.6
  Bottom 0.203: Q10.2 19.18,11.53 R40.1 18.52,11.58 18.52,12.93 17.67,13.78 16.31,13.78 14.71,15.38 v14.71,15.6
D8/TX1_H
  Bottom 0.203: J10.2 24.31,12.1 23.3,11.09 Q10.3 21.14,12.23 R41.1
D9/RX1  (via drill 0.3 pad 0.6)
  Top 0.203: U5.12 16.57,29.05 14.56,27.03 14.56,24.38 12.99,22.81 12.99,21.38 15.33,19.04 15.33,15.36 14.72,14.75 v14.33,14.75
  Bottom 0.203: v14.33,14.75 14.48,14.75 15.9,13.33 17.53,13.33 18.16,12.7 18.16,12.12 17.9,11.86 17.9,9.91 R42.1 18.67,9.52 Q11.2
D9/RX1_H
  Bottom 0.203: R43.1 21.14,7.67 Q11.3 21.14,9.66 21.58,10.1 J10.1
D10
  Top 0.203: U5.13 16.68,28.65 14.91,26.89 14.91,21.02 16.35,19.58 16.35,14.97 14.91,13.53 14.91,11.38 9.99,6.46 9.99,3.07 J3.5
D11
  Top 0.203: U5.14 16.82,28.25 15.32,26.75 15.32,21.18 16.73,19.77 16.73,14.79 15.32,13.38 15.32,11.28 10.44,6.4 10.44,5.16 J3.6
D12
  Top 0.203: U5.15 17.77,27.11 16.48,27.11 15.71,26.34 15.71,21.32 17.08,19.95 17.08,14.64 15.71,13.27 15.71,11.12 11.59,7 11.59,5.81 12.49,4.91 12.49,3.11 J3.7
D13
  Top 0.152: U5.16 18.47,26.96 18.26,26.74 16.67,26.74
  Top 0.203: 16.67,26.74 16.08,26.15 16.08,21.52 17.44,20.17 17.44,14.47 16.08,13.12 16.08,10.85 12.17,6.94 12.17,5.97 J3.8
D14
  Top 0.152: 16.44,25.93 16.94,26.43 18.39,26.43 18.87,26.91 U5.17
  Top 0.203: J3.9 15.07,3.07 15.07,4.93 14.31,5.68 13.17,5.68 12.81,6.04 12.81,7.01 16.44,10.64 16.44,12.88 17.79,14.24 17.79,20.33 16.44,21.68 16.44,25.93
D15
  Top 0.152: U5.18 19.27,26.86 18.53,26.12 17.25,26.12 17.11,25.99
  Top 0.203: 17.11,25.99 16.8,25.68 16.8,21.97 18.15,20.62 18.15,14.05 16.8,12.7 16.8,10.6 18.79,8.61 18.79,5.86 18.56,5.63 17.53,5.63 16.32,4.42 J3.10
D16  (via drill 0.35)
  Top 0.203: U5.27 22.87,26.93 23.55,26.26 23.55,16.97 21.55,14.97 21.55,10.6 20.51,9.55 20.51,7.09 v19.44,6.02
  Bottom 0.2: v19.44,6.02 v19.45,6.02 20.08,5.38 20.08,3.16 J3.11
D17
  Top 0.203: U5.28 23.27,27.07 23.94,26.4 23.94,16.79 21.9,14.75 21.9,10.35 20.96,9.41 20.96,6.33 19.05,4.42 J3.12
D18
  Top 0.203: J3.13 20.09,3.13 20.09,4.91 21.36,6.18 21.36,9.25 22.26,10.15 22.26,14.42 24.38,16.54 24.38,27.98 U5.29
D19
  Top 0.203: U5.30 24.58,28.65 24.82,28.41 24.82,16.26 22.62,14.06 22.62,10 21.77,9.15 21.77,4.85 J3.14
D20
  Top 0.203: U5.31 24.84,29.05 25.23,28.66 25.23,6.34 24.57,5.68 23.46,5.68 22.62,4.84 22.62,2.91 23.65,1.88 J3.15
D21
  Top 0.203: U5.32 24.94,29.45 25.66,28.74 25.66,21.9 25.64,21.88 25.64,6.16 23.9,4.42 J3.16
D22
  Top 0.203: U5.34 24.77,30.25 26.07,28.95 26.07,6.09 25.21,5.23 25.21,3 26.33,1.88 J3.17
D23
  Top 0.203: U5.35 25.02,30.66 26.43,29.25 J3.18
D24
  Top 0.203: U5.36 25.2,31.05 26.79,29.46 26.78,29.45 26.78,5.75 27.61,4.91 27.61,3.23 J3.19
D25  (via drill 0.3 pad 0.6)
  Top 0.203: U5.37 25.44,31.45 25.57,31.32 | 25.57,31.32 27.15,29.74 27.15,5.88 28.61,4.42 J3.20 | v25.87,31.77 25.87,31.62 25.57,31.32 | v25.79,33.54 27.13,33.54 27.89,34.3 27.89,36 27.13,36.77 27.13,38.05 v27.11,38.07 | v25.99,36.56 25.47,37.08 D1.-
  Bottom 0.203: v25.87,31.77 25.87,33.46 v25.79,33.54 | v27.11,38.07 25.99,36.95 v25.99,36.56
DN
  Top 0.203: R5.1 20.49,38.81 20.01,39.3 19.71,39.3 18.25,40.76 J5.B7 18.25,42.97 18.12,43.1 17.37,43.1 17.25,42.98 J5.A7
DP
  Top 0.203: R6.1 19.59,38.89 17.76,40.72 17.74,40.72 | 17.74,40.72 J5.A6 | J5.B6 16.75,40.86 16.89,40.72 17.74,40.72
GND  (via drill 0.3, 0.3 pad 0.6, 0.35)
  Top 0.152: v19.45,25.78 19.45,25.88 19.67,26.1
  Top 0.203: IC1.PAD 6.53,27.95 6.53,28.3 v6.53,28.53 | v18.24,28.36 18.64,28.36 18.82,28.18 19.58,28.18 19.67,28.09 U5.19 19.67,26.1 | v17.6,22.1 17.6,22.37 17.19,22.78 17.19,24.84 v17.66,25.31 17.72,25.25 | v13.7,6.9
  Top 0.305: J5.A12 13.18,42.94 13.18,43.16 | 13.18,43.16 J5.P$2 | J5.B1 13.25,43.16 13.18,43.16 | J5.B12 21.77,43.18 | 21.77,43.18 J5.P$1 | J5.A1 21.77,42.88 21.77,43.18
  Top 0.406: R2.2 3.99,7.03 v3.94,7.08 | C19.1 6.13,10.9 6.55,10.49 6.92,10.49 v7.01,10.4
  Top 0.5: R21.2 33.14,12.45 33.06,12.53 U1.2 | X1.4 17.72,25.25 17.72,24.44 C3.1 | U4.1 v13.7,6.9 | U4.9 U4.10 | v10.96,17.34 10.96,16.26 10.59,15.89 U4.34 7.8,15.89 v7.69,16
  Top 0.508: C11.1 18.53,38.8 v18.18,39.15 | C13.1 21.48,38.86 v21.05,39.29 | v27.94,46.32 27.58,46.68 26.01,46.68 25.85,46.84 J4.P$4 | J4.P$2 28.19,42.18 | 28.19,42.18 28.13,41.44 | 28.19,42.18 28.17,41.93 28.16,41.94 27.99,42.11 | IC1.6 v6.26,26 | v6.26,26 6.26,27.05 6.79,27.58 IC1.PAD 7.75,28.43 v7.75,28.45 8.8,29.5 IC1.1 9.09,30.66 9.5,30.66 v10.77,31.93 10.95,32.11 v10.95,33.85 | v1.8,27.38 C30.1 3.38,28.51 C31.1 | C31.1 3.4,27.71 v3.13,27.44 3.13,26.75 C32.1 3.28,26.36 v2.46,26.36 | IC1.3 6.26,28.8 v6.53,28.53 | J5.P$3 J5.P$4 9.39,47.36 J6.P$3 | SW2.1 33.89,35.98 v33.89,36.45 | U2.2 32.79,24.66 32.33,24.2 32.33,22.11 32.82,21.62 v32.82,20.64 | 7.43,27.81 v7.43,25.96 6.3,25.96 v6.26,26 | v4.65,46.61 6.23,46.61 | C31.1 6.3,28.53 6.53,28.3 | C4.1 22.6,22.67 v22.52,22.59
  Top 0.6: C22.1 33.62,18.15 C2.1 32.82,20.33 v32.82,20.64 | U1.2 33.02,13.35 v33.02,14.31 | v32.09,14.54 32.79,14.54 v33.02,14.31 | v33.02,14.31 33.98,14.31 v34.01,14.34 | v29.77,6.37 29.77,7.83 C33.1 31.22,7.92 C25.1 31.42,6.45 v31.05,6.08
  Top 0.61: 5.51,39.05 5.52,39.05 | 5.52,39.05 R9.2 | J6.P$2 4.51,41.61 | 3.66,40.76 v3.66,40.63 | U6.4 8.4,35.87 v8.4,35.14 | R15.1 9.98,32.72 v10.77,31.93 | v10.03,38.11 11.11,39.19 v12.82,39.19 | C14.1 28.18,32.96 27.76,32.54 27.76,31.71 v27.39,31.34 | v30.49,32.49 30.58,32.4 C20.1 31.89,32.04 C21.1 31.64,30.96 30.55,30.96 R37.1 30.5,31.52 v30.35,31.67 | v31.26,28.26 31.1,28.1 C24.1 | C24.1 30.26,26.58 C23.1 30.34,25.6 31.73,24.2 32.33,24.2 | v30.86,29.09 30.26,28.49 C24.1 | IC1.6 v6.26,23.75 | v8.17,22.39 7.79,22.01 4.46,22.01 3.38,20.93 v0.95,20.93 | SW1.1 2.1,36.6 J9.SS2 | J4.P$2 27.68,41.38 v27.25,41.38 27.15,41.28 | R36.2 26.45,41.28 27.15,41.28 | 27.15,41.28 27.23,41.28 v27.23,40.6 27.37,40.74 28.05,40.74 28.16,40.85 28.16,41.94 | U4.4 17.17,6.51 v17.56,6.51 17.7,6.37 U4.5 | U4.9 22.51,6.58 v23.24,7.31 | U4.10 23.65,6.48 24.3,7.13 v24.3,7.25 | X1.2 C4.1 | 5.52,39.05 4.81,39.76 4.8,39.76 | 6.23,46.61 v7.32,47.7 8.85,47.7 J6.P$3 | J6.P$4 3.84,46.61 v4.65,46.61 | J4.P$4 25.21,47.36 J5.P$3 | J4.P$3 31.63,47.08 v30.76,47.08
  Top 0.8: v28.18,44.44 28.13,44.39 28.13,41.44
  Top 1.016: 4.8,39.76 J6.P$2
  Bottom 0.5: 29.38,22.94 29.38,24.42 | C15.1 13.63,37.76 14.3,37.09 15.54,37.09 16.19,36.43 17.97,36.43 | v18.18,39.15 18.25,39.08 IC3.2 18.25,36.71 17.97,36.43 | 20.28,36.93 19.78,36.43 | 19.78,36.43 17.97,36.43 | 19.78,36.43 19.75,36.4 19.75,34.48 | v13.7,6.9 14.6,6.01 16.22,6.01
  Bottom 0.508: C6.1 19.77,31.72 v19.72,31.77 | C9.1 20.16,30.59 v19.77,30.98 | v28.18,44.44 28.18,46.08 v27.94,46.32 30,46.32 v30.76,47.08 31.48,47.8 J1.SS2 32.7,38.93 32.76,38.87 32.76,36.6 32.7,36.54 | v10.95,33.85 10.8,33.85 9.51,35.14 v8.4,35.14 8.4,36.48 v10.03,38.11 | v12.82,39.19 12.43,39.58 12.43,42.44 J5.P$2 14.42,41.94 R7.2 16.03,42.01 18.73,42.01 R8.1 20.58,41.94 J5.P$1 | 20.98,39.22 v21.05,39.29 21.05,38.64 21.99,37.7 C7.1 C12.1 20.71,37.13 20.48,37.13 20.28,36.93 | v33.89,36.45 33.54,36.8 J1.SS1 32.7,36.54 | 32.7,36.54 J7.SS2 31.99,32.49 v30.49,32.49 30.35,32.35 v30.35,31.67 30.35,30.88 30.6,30.63 30.6,29.35 v30.86,29.09 30.86,28.66 v31.26,28.26 v31.27,28.25 v32.04,28.25 29.38,25.59 29.38,24.42 | v32.82,20.64 32.7,20.76 J7.SS1 | J10.SS2 32.7,19.48 | 1.03,20.93 v0.95,20.93 | J11.SS1 1.03,19.87 1.03,20.93 | J11.SS2 2.3,7.55 | 2.3,7.55 2.3,5.14 v1.32,4.16 1.51,3.97 4.01,3.97 J3.1 | 10.47,24.7 J8.4 8.69,24.7 v7.43,25.96 | v7.32,47.7 7.23,47.79 v4.21,47.79 v4.2,47.8 J9.SS1 3.5,46.6 v3.5,42.69 3.5,41.63 v3.48,41.61 3.66,41.43 v3.66,40.63 2.3,39.27 J9.SS2 J8.SS1 2.3,27.88 v1.8,27.38 2.46,26.72 v2.46,26.36 | v18.24,28.36 18.36,28.48 18.68,28.48 19.53,29.34 v19.53,29.58 20.54,29.58 C10.1 C9.1 | C9.1 C6.1 | C6.1 C8.1 19.87,32.74 v19.75,32.62 19.75,34.48 | 21.99,38.1 23.88,38.1 23.98,38 C1.1 24.21,37.33 24.69,36.85 24.69,36.74 25.84,35.59 26.88,35.59 27.09,35.38 | 27.09,35.38 27.39,35.08 27.39,32.43 27.39,31.31 | 27.09,35.38 29.01,37.3 29.01,39.03 27.44,40.6 v27.23,40.6 | v3.13,27.44 2.46,26.77 v2.46,26.36 | v2.46,26.36 2.46,26.22 v1.6,25.36 1.6,24.65 v2.2,24.05 2.3,23.95 J8.SS2 1.03,20.93
  Bottom 0.508: J11.4 9.88,10.1 | v3.94,7.08 3.47,7.55 2.3,7.55 | J10.SS1 32.7,5.39 v32.76,5.33
  Bottom 0.6: v18.88,19.13 v18.87,19.12 v18.86,19.13 | v18.88,19.99 v18.87,20
  Bottom 0.61: J9.4 10.03,39.07 v10.03,38.11 | v6.26,23.75 6.81,23.75 v8.17,22.39 | 27.37,32.45 27.39,32.43 | C34.1 C5.1 18.51,31.14 19.09,31.72 19.77,31.72 | J11.4 7.56,10.1 7.26,10.4 v7.01,10.4 | J10.4 23.82,17.48 19.45,17.48 18.94,17.99 18.94,18.21 v18.92,18.23 18.92,19.07 v18.87,19.12 v18.87,19.98 | 16.22,6.01 16.26,6.05 17.09,6.05 v17.56,6.51 | IC2.2 19.06,19.31 v18.88,19.13 | v18.87,19.98 v18.88,19.99 | C26.1 14.9,23.16 C27.1 14.86,24.52 P4.P$1 | C26.1 16.54,23.16 v17.6,22.1 | IC4.2 21.33,25.78 v19.45,25.78 19.22,25.55 17.96,25.55 17.73,25.31 v17.66,25.31 17.17,24.82 | 17.17,24.82 P4.P$1 | 29.38,22.94 28.32,21.88 23.74,21.88 C28.1 23.03,22.59 v22.52,22.59 21.9,21.97 C29.1 21.38,21.29 v20.24,21.29 19.51,21.29 v19.35,21.45 19.2,21.45 v18.56,22.09 v17.61,22.09 v17.6,22.1 | v17.6,22.1 18.87,20.83 v18.87,19.98 | R26.2 18.35,23.64 17.17,24.82 | C26.1 16.22,23.16 P4.P$1 | v12.82,39.19 13.36,39.73 C17.1 C15.1 13.17,39.19 v12.82,39.19
  Bottom 0.813: J5.P$1 23.11,44.46 23.64,44.46 24.48,45.3 J1.4
  Bottom 1.016: J7.4 26.78,30.7 27.39,31.31 v27.39,31.34
  other vias: 2.3,36.8 4.42,1.13 3.83,3.76 30.75,1.11 33.88,4.1 33.92,6.34 28.79,6.51 27.69,32.55 33.74,40.58 31.43,44.29 33.74,44.77 31.03,48.76 23.57,48.82 15.55,48.9 6.43,48.84 1.16,44.86 1.03,22.8 8.7,23.19 1.61,18.87 1.08,14.25 1.06,9.26 4.5,5.64 5.82,5.97 33.63,20.61 34.05,21.26 34.04,9.55 34.06,8.19 3.15,18.89 4.85,18.82 6.69,18.84 8.56,18.88 10.18,18.67 6.34,15.98 4.89,15.97 3.16,15.91 1.77,15.88 4.79,20.76 6.66,20.76 8.66,20.7 3.06,14.18 4.67,14.2 5.32,12.14 6.06,14.4 3.8,10.94 3.98,21.5 2.73,20.71 2.01,17.81 2.88,17.81 2.03,16.88 2.88,16.88 1.36,5.29 2.68,5
  pour Bottom (rank 2, no thermals): -3.41,23.61 -3.41,48.16 -0.54,51.03 1.09,52.66 10.08,52.66 34.66,52.66 36.06,51.26 36.45,50.87 36.45,-1.09 34.12,-3.42 24.28,-3.42 0,-3.42 -0.93,-2.49 -3.41,-0.01 -3.41,23.57
  pour Top (rank 2, no thermals): -3.89,11.3 -3.89,48.58 0.71,53.18 34.82,53.18 37.17,50.83 37.17,-2.21 35.08,-4.3 -0.91,-4.3 -0.93,-4.28 -3.89,-1.32 -3.89,11.28
LR_BOOT  (via drill 0.35)
  Top 0.152: U4.2 14.73,6.47 14.73,7.01 v14.68,7.06
  Top 0.203: v6.97,7.61 6.39,7.03 R2.1 5.51,6.71 5.51,6.7 5.2,6.39 2.21,6.39 SW3.1
  Bottom 0.152: v14.68,7.06 14.68,7.14 14.25,7.57 7.01,7.57 v6.97,7.61
N$1  (via drill 0.3 pad 0.6)
  Top 0.203: v24.28,34.87 24.28,34.82 23.75,34.29 U5.43
  Bottom 0.203: v24.28,34.87 24.28,36.13 C1.2 23.86,36.43 23.29,37 23.28,37 R1.2
N$2  (via drill 0.3 pad 0.6)
  Top 0.203: J5.B5 15.75,42.94 16.19,43.38 v16.67,43.38
  Bottom 0.203: v16.67,43.38 16.67,43.14 16.36,42.83 R7.1
N$3
  Top 0.61: U2.3 33.74,23.2 L1.1
  pour Top (no thermals): 33.47,26.95 33.47,27.19 33.71,27.43 34.26,27.43 34.41,27.28 34.41,22.48 34.17,22.24 33.99,22.06 33.48,22.06 33.08,22.46 33.08,22.61 33.08,24.58 33.08,24.91 33.27,25.1 33.48,25.31 33.48,26.94
N$4
  pour Top (no thermals): 32.2,13.77 32.17,13.8 28.38,13.8 27.71,13.13 27.71,11.97 27.71,10.98 27.91,10.78 28.75,10.78 28.97,11 28.99,11.02 28.99,11.99 29.71,12.71 29.86,12.71 29.94,12.79 32.09,12.79 32.28,12.98 32.28,13.06 32.28,13.71 32.19,13.8
N$6  (via drill 0.3 pad 0.6)
  Top 0.203: J5.A5 18.75,43.05 v18.09,43.71
  Bottom 0.203: v18.09,43.71 18.09,43.4 18.67,42.83 R8.2
N$7
  Top 0.203: 2.66,10.5 2.2,10.5 | 2.2,10.5 SW3.2 | R14.2 4.48,7.92 3.88,8.52 2.76,8.52 2.2,9.08 2.2,10.5
N$8
  Top 0.813: 4.02,17.37 4.01,17.37 | U4.33 4.01,17.37 ANT1.P$3
  Top 0.9: 4.01,17.37 ANT1.P$3
N$9
  Top 0.203: R23.1 29.93,30.6 29.93,30.59 30.49,30.03 R37.2 30.85,30.03 31.53,29.35 U2.5
N$10
  Top 0.203: R15.2 8.65,31.83 7.54,30.71 IC1.2
N$11
  Top 0.305: R18.1 24.05,38.96 D4.+
N$13
  Top 0.3: R16.2 34.01,11.96 R21.1 34.02,13.29 U1.3
N$14
  Top 0.305: R17.1 25.47,39.55 D1.+
NRST  (via drill 0.35)
  Top 0.152: 15.96,6.64 U4.3 15.76,6.57 v15.76,6.95
  Top 0.203: v4.12,9.14 4.45,8.81 R10.2 4.52,9.22 D5.+ 4.52,10.57 C19.2
  Bottom 0.152: v15.76,6.95 15.65,6.95 14.72,7.88 7.66,7.88 6.39,9.14 v4.12,9.14
QSPI_CS
  Top 0.203: U5.56 17.67,34.69 14.88,34.69 13.48,36.09 10.71,36.09 9.11,34.49 7.73,34.49 7.12,35.1 7.12,38.9 8.03,39.8 U6.1 9.93,41.2 R4.2 10.68,41.43 11.26,42.01 11.26,42.02 R3.2
QSPI_D0
  Top 0.203: U6.5 18.41,35.99 19.27,35.13 U5.53
QSPI_D1
  Top 0.203: U5.55 18.47,34.79 18.21,35.04 15.15,35.04 13.57,36.63 7.77,36.63 7.48,36.92 7.48,38.1 7.95,38.57 8.49,38.57 U6.2
QSPI_D2
  Top 0.203: U5.54 18.87,35 18.45,35.42 15.28,35.42 13.53,37.17 8.62,37.17 U6.3
QSPI_D3
  Top 0.203: U5.51 20.07,35.34 18.69,36.72 18.09,36.72 17.76,37.04 17.76,38.05 17.27,38.53 U6.7
QSPI_SCK
  Top 0.203: U6.6 16.93,37.27 17.84,36.36 18.54,36.36 19.67,35.23 U5.52
RESET  (via drill 0.3 pad 0.6, 0.35)
  Top 0.152: v22.87,25.26 23.04,25.26 23.22,25.08 23.22,17.2 20.35,14.33 v19.67,14.33 | D5.- 6.19,9.71 7.34,9.71 7.66,10.03 7.66,11.03 7.32,11.37 v7.3,11.37
  Top 0.203: U5.26 22.47,26.75 22.87,26.35 v22.87,25.26 | R13.2 29.48,32.91 C14.2 29.88,32.96 v30.35,33.43 | v31.45,39.28 31.8,38.93 33.57,38.93 33.4,39.1 SW2.2
  Bottom 0.152: v19.67,14.33 19.67,13.84 19.3,13.47 18.46,13.47 17.78,14.15 16.98,14.15 14.91,16.23 12.76,16.23 11.57,15.04 8.47,15.04 7.04,13.61 7.04,11.63 v7.3,11.37
  Bottom 0.203: v31.45,39.28 31.02,38.85 31.02,34.74 30.34,34.06 v30.34,33.44 v30.35,33.43 29.74,32.82 29.74,30.77 30.09,30.42 30.09,28.01 28.4,26.32 28.4,24.81 27.08,23.49 23.58,23.49 22.79,24.28 22.79,25.18 v22.87,25.26
RF_3V3  (via drill 0.3, 0.35 pad 0.6)
  Top 0.406: v14.26,22.06 14.26,20.96 15.81,19.41 15.81,15.13 14.32,13.64 v14.3,13.64 | v7.94,13.05 8,13.05 8.14,12.91 8.14,9.85 7.1,8.81 R10.1 5.82,8.8 R14.1
  Top 0.5: v14.26,22.06 13.95,22.37 U4.32
  Bottom 0.406: v14.3,13.64 14.03,13.37 12.27,13.37 12.01,13.11 8,13.11 v7.94,13.05
  Bottom 0.6: 16.5,21.49 C26.2 16.42,21.4
  Bottom 0.61: IC2.5 16.42,21.4 | C26.2 15.08,21.38 C27.2 | C27.2 14.4,22.06 v14.26,22.06 | C27.2 14.86,20.19 P3.P$1
RF_RX  (via drill 0.35)
  Top 0.203: U4.26 20.3,22.22 22.19,20.33 22.19,18.14 20.44,16.39 v20.44,16.04 | v11.59,29.67 12.26,29.67 R12.2
  Bottom 0.203: v20.44,16.04 17.47,16.04 15.25,18.26 14.29,18.26 12.97,19.58 12.97,26.32 11.57,27.72 11.57,29.65 v11.59,29.67 14.3,29.67 P2.P$1
RF_TX  (via drill 0.35)
  Top 0.203: U4.25 21.38,21.83 22.63,20.59 22.63,17.49 v21.46,16.32 | v12.46,28.73 13.2,29.46 R11.2
  Bottom 0.203: v21.46,16.32 v21.45,16.32 21.1,16.67 17.35,16.67 15.24,18.78 14.66,18.78 13.43,20.02 13.43,26.48 | 13.43,26.48 13.43,26.66 13.99,27.22 P1.P$1 | v12.46,28.73 12.46,27.45 13.43,26.48
USB_D+
  Top 0.203: U5.47 21.67,35.59 20.18,37.08 20.16,37.08 19.92,37.33 R6.2
USB_D-
  Top 0.203: U5.46 22.07,35.74 20.49,37.32 R5.2
XIN
  Top 0.203: U5.20 20.1,27.38 20.1,24.59 X1.1 18.98,23.47 C3.2
XOUT
  Top 0.203: C4.2 22.08,24.45 X1.3 21.27,26.13 20.47,26.93 U5.21

## Text on the board
tPlace: - | + | - | + | www.elecrow.com | 7 | 23 | 25 | 24
bPlace: SKU:CRT01268D | Lora LR1262 Node Board V1.0 | GP2 | GND | NC | 5V | 5V | NC | GND | A1 | GND | GP3 | LR-RX | NC | 5V | LR-TX | 5V | NC | GND | GND | A0 | SCL-GP5 | TX1-GP8 | SDA-GP4 | RX1-GP9 | LR-3V | SCL | GND | SDA | 5V | 5V | TX1 | RX1 | GND | 11 | 7 | 25 | 24